# Altium PCB MotorControllerBackPlane.PcbDoc
Units mil, origin at the board's own origin, x right, y up, seen from the top; angles counter-clockwise.
Board outline 2770 x 6500 mil, 2 copper layers (Top Layer, Bottom Layer); 39 components, 42 nets, 235 pads, 37 vias.
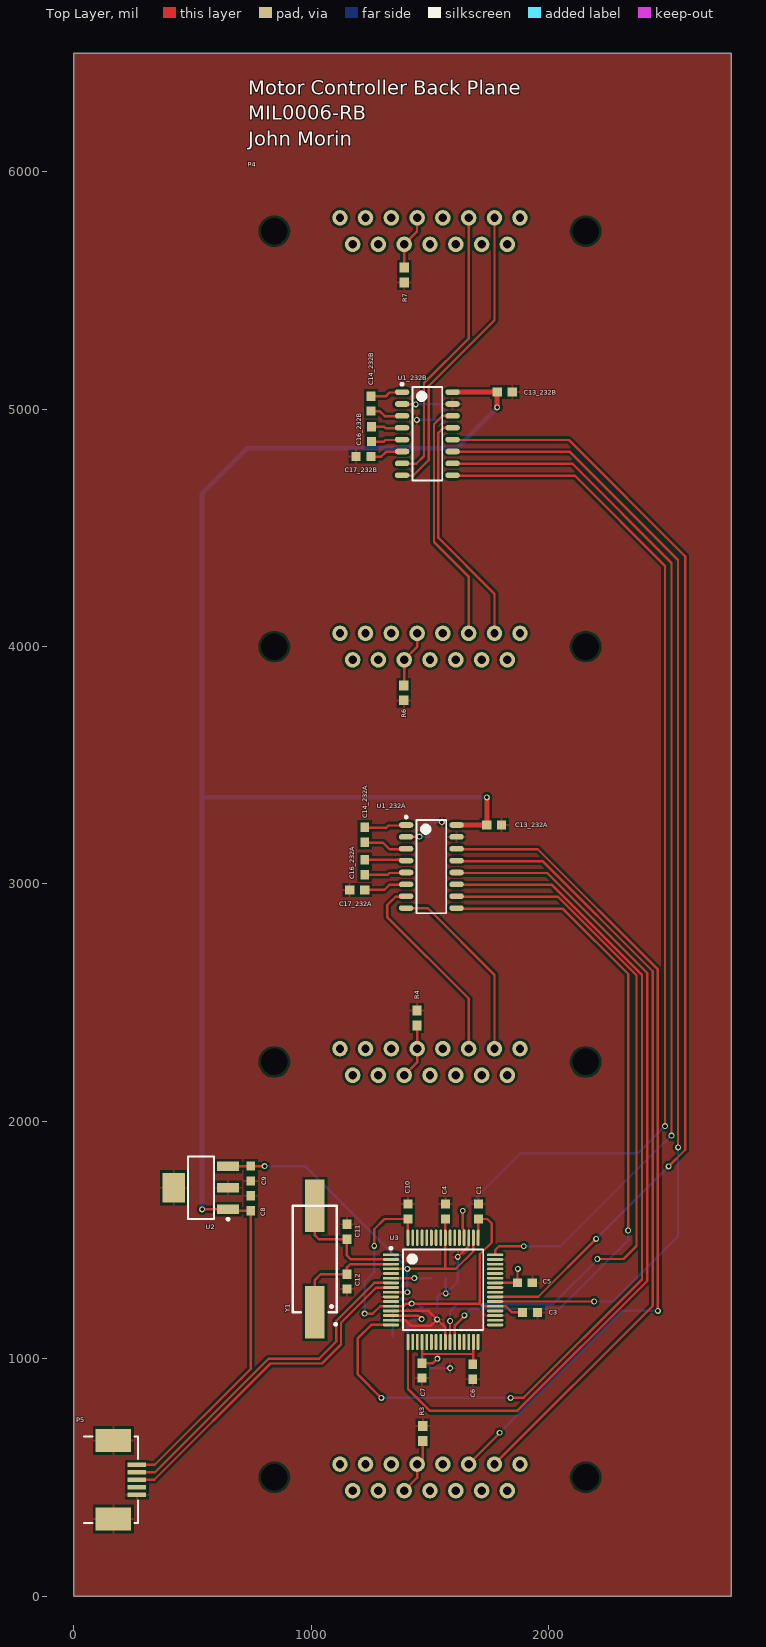
[diagram p0: Top Layer view]
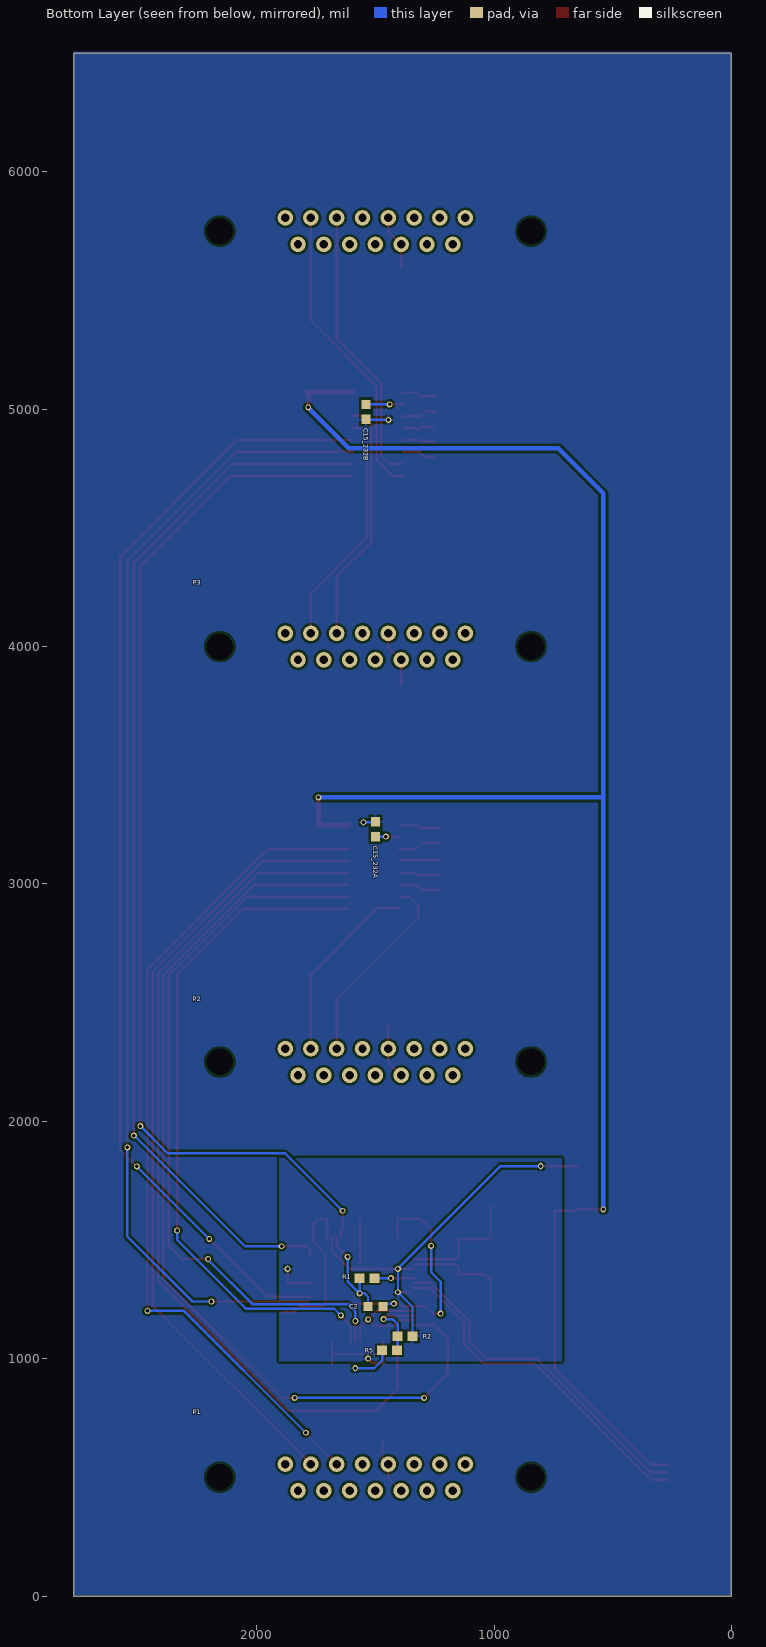
[diagram p1: Bottom Layer view, seen from below]

## Layer stack, top to bottom
Top Solder: solder mask 0.4, Solder Resist, Dk 3.5
Top Layer: signal copper 1.4
Dielectric 1: dielectric 12.6, FR-4, Dk 4.8
Bottom Layer: signal copper 1.4
Bottom Solder: solder mask 0.4, Solder Resist, Dk 3.5

## Board outline
0,0 0,6500 2770,6500 2770,0

## Design rules (kind name [scope] priority, off if disabled: settings)
Clearance [All] p1: gap=10 ignorepadtopadclearanceinfootprint=FALSE except(0: Arc-Hole Track-Hole SMDPad-Hole THPad-Hole Via-Hole Fill-Hole Poly-Hole Region-Hole Text-Hole; 4: Arc-Arc Arc-Track Arc-SMDPad Track-Track Track-SMDPad SMDPad-SMDPad)
PolygonConnect [All] p1: connectstyle=Relief reliefconductorwidth=10 reliefentries=4 polygonreliefangle="90 Angle" airgapwidth=10
RoutingVias [All] p1: holewidth=28 width=50 viastyle="Through Hole" minholewidth=28 minwidth=50 maxholewidth=28 maxwidth=50
SolderMaskExpansion [All] p1: expansion=4
Width [All] p1: maxlimit=20 minlimit=10 preferedwidth=10
30 further rules are at their usual default settings.

## Classes and differential pairs
channel class RS232: 232A 232B
component class MotorControllerBackPlane: C1 C2 C3 C4 C5 C6 C7 C8 C9 C10 C11 C12 P1 P2 P3 P4 P5 R1 R2 R3 R4 R5 R6 R7 U2 U3 Y1
component class 232B: C13_232B C14_232B C15_232B C16_232B C17_232B U1_232B
component class 232A: C13_232A C14_232A C15_232A C16_232A C17_232A U1_232A

## Components (designator, comment, footprint, x,y, rotation, side; value= is the part's Value field where it differs from the comment)
C1 "Cap" CAPC0603 1703.86,1620 r90 top value=100nF
C2 "Cap" CAPC0603 1499.68,1220 r0 bottom value=100nF
C3 "Cap" CAPC0603 1921.5,1195 r0 top value=100nF
C4 "Cap" CAPC0603 1564.84,1620 r90 top value=100nF
C5 "Cap" CAPC0603 1900,1320 r0 top value=100nF
C6 "Cap" CAPC0603 1680,945 r270 top value=100nF
C7 "Cap" CAPC0603 1466.42,950 r270 top value=100nF
C8 "Cap" CAPC0603 745,1655 r90 top value=100nF
C9 "Cap" CAPC0603 745,1780 r270 top value=100nF
C10 "Cap" CAPC0603 1407.36,1620 r90 top value=100nF
C11 "Cap" CAPC0603 1150,1535 r90 top value=36pF
C12 "Cap" CAPC0603 1150,1325 r270 top value=36pF
C13_232A "Cap" CAPC0603 1770,3248.19 r0 top value=1uF (schematic designator C13)
C13_232B "Cap" CAPC0603 1815,5071.69 r0 top value=1uF (schematic designator C13)
C14_232A "Cap" CAPC0603 1225,3206.81 r270 top value=1uF (schematic designator C14)
C14_232B "Cap" CAPC0603 1251.5,5023.5 r270 top value=1uF (schematic designator C14)
C15_232A "Cap" CAPC0603 1500,3230 r90 bottom value=1uF (schematic designator C15)
C15_232B "Cap" CAPC0603 1540,4988.5 r270 bottom value=1uF (schematic designator C15)
C16_232A "Cap" CAPC0603 1225,3070.43 r270 top value=1uF (schematic designator C16)
C16_232B "Cap" CAPC0603 1252.99,4895 r270 top value=1uF (schematic designator C16)
C17_232A "Cap" CAPC0603 1193.19,2975 r180 top value=1uF (schematic designator C17)
C17_232B "Cap" CAPC0603 1220,4800 r180 top value=1uF (schematic designator C17)
P1 "L717SDAH15POL2" L717SDAH15POL2#1 1500,500 r180 bottom
P2 "L717SDAH15POL2" L717SDAH15POL2#1 1500,2250 r180 bottom
P3 "L717SDAH15POL2" L717SDAH15POL2#1 1500,4000 r180 bottom
P4 "L717SDAH15POL2" L717SDAH15POL2#2 1500,5750 r180 top
P5 "UX60SC-MB-5ST" UX60SC-MB-5ST 265,490 r270 top
R1 "Res" RES0603 1535,1339.53 r0 bottom value=12k
R2 "Res" RES0603 1375,1095 r0 bottom value=1k
R3 "Res" RES0603 1470,685 r90 top value=0
R4 "Res" RES0603 1445,2435 r90 top value=0
R5 "Res" RES0603 1440,1035 r0 bottom value=100k
R6 "Res" RES0603 1390,3805 r270 top value=0
R7 "Res" RES0603 1391.34,5565 r270 top value=0
U1_232A "RS-232" RS-232 1505.79,3073.19 r0 top (schematic designator U1)
U1_232B "RS-232" RS-232 1488.7,4896.69 r0 top (schematic designator U1)
U2 "3.3V LDO Reg" SOT23-4n 535,1720 r180 top
U3 "FT4232H" FT4232HL 1555,1290 r0 top
Y1 "ABLS2-12.000MHZ-D4Y-T" HC49/US 1015,1420 r90 top

## Footprints (in the part's own frame and the unit in brackets; to place one, negate y for a bottom-side part, rotate by r counter-clockwise, add the part's x,y. Pads: shape width x height; smd on the part's side, far side on the other; paste and mask are expansions set on the pad)
CAPC0603 [mm] "Chip Capacitor, 2-Leads, Body 1.60x0.80mm, IPC Medium Density"
  rect 1x0.95 smd: 1(-0.8,0) 2(0.8,0)
  body extent -0.88,-0.48 0.87,0.48, height 0.8
FT4232HL [mm] "TSQFP, 64-Leads, Body 10.00x10.00mm, Pitch 0.50mm, IPC Medium Density"
  oval 1.75x0.3 smd: 1(-5.575,3.75) 2(-5.575,3.25) 3(-5.575,2.75) 4(-5.575,2.25) 5(-5.575,1.75) 6(-5.575,1.25) 7(-5.575,0.75) 8(-5.575,0.25) 9(-5.575,-0.25) 10(-5.575,-0.75) 11(-5.575,-1.25) 12(-5.575,-1.75) 13(-5.575,-2.25) 14(-5.575,-2.75) 15(-5.575,-3.25) 16(-5.575,-3.75) 33(5.575,-3.75) 34(5.575,-3.25) 35(5.575,-2.75) 36(5.575,-2.25) 37(5.575,-1.75) 38(5.575,-1.25) 39(5.575,-0.75) 40(5.575,-0.25) 41(5.575,0.25) 42(5.575,0.75) 43(5.575,1.25) 44(5.575,1.75) 45(5.575,2.25) 46(5.575,2.75) 47(5.575,3.25) 48(5.575,3.75)
  oval 0.3x1.75 smd: 17(-3.75,-5.575) 18(-3.25,-5.575) 19(-2.75,-5.575) 20(-2.25,-5.575) 21(-1.75,-5.575) 22(-1.25,-5.575) 23(-0.75,-5.575) 24(-0.25,-5.575) 25(0.25,-5.575) 26(0.75,-5.575) 27(1.25,-5.575) 28(1.75,-5.575) 29(2.25,-5.575) 30(2.75,-5.575) 31(3.25,-5.575) 32(3.75,-5.575) 49(3.75,5.575) 50(3.25,5.575) 51(2.75,5.575) 52(2.25,5.575) 53(1.75,5.575) 54(1.25,5.575) 55(0.75,5.575) 56(0.25,5.575) 57(-0.25,5.575) 58(-0.75,5.575) 59(-1.25,5.575) 60(-1.75,5.575) 61(-2.25,5.575) 62(-2.75,5.575) 63(-3.25,5.575) 64(-3.75,5.575)
  silkscreen extent -5.7,-4.3 4.3,4.57, body extent -5,-5 5,5, height 1.6
HC49/US [mm]
  rect 5.6x2.1 smd: 1(-5.7,0) 2(5.7,0)
  silkscreen extent -7.11,-2.35 5.7,2.35, body extent -6.35,-2.35 6.35,2.35, height 3.16
L717SDAH15POL2#1 [mm] "CONN D-SUB PLUG 15POS VERT SLDR"
  round 1.524 hole 2.84: 0(-16.65,0) 0(16.65,0)
  round 1.662 hole 0.9: 1(-9.63,1.42) 2(-6.9,1.42) 3(-4.14,1.42) 4(-1.38,1.42) 5(1.38,1.42) 6(4.14,1.42) 7(6.9,1.42) 8(9.63,1.42) 9(-8.28,-1.42) 10(-5.52,-1.42) 11(-2.76,-1.42) 12(0,-1.42) 13(2.76,-1.42) 14(5.52,-1.42) 15(8.28,-1.42)
  Top Layer pour cut-out: 3.886,-4.851
  body extent -19.6,-6.27 19.6,6.28, height 11.69
L717SDAH15POL2#2 [mm] "CONN D-SUB PLUG 15POS VERT SLDR"
  round 1.524 hole 2.84: 0(-16.65,0) 0(16.65,0)
  round 1.662 hole 0.9: 1(-9.63,-1.42) 2(-6.9,-1.42) 3(-4.14,-1.42) 4(-1.38,-1.42) 5(1.38,-1.42) 6(4.14,-1.42) 7(6.9,-1.42) 8(9.63,-1.42) 9(-8.28,1.42) 10(-5.52,1.42) 11(-2.76,1.42) 12(0,1.42) 13(2.76,1.42) 14(5.52,1.42) 15(8.28,1.42)
  Top Layer pour cut-out: 3.886,4.851
  body extent -19.6,-6.28 19.6,6.27, height 11.69
RES0603 [mm] "Chip Resistor, 2-Leads, Body 1.60x0.80mm, IPC Medium Density"
  rect 1.05x1 smd: 1(-0.8,0) 2(0.8,0)
  body extent -0.88,-0.48 0.87,0.47, height 0.8
RS-232 [mm] "IC DVR/RCVR RS232 DUAL 16SOIC"
  oval 1.55x0.6 smd: 1(-2.7,4.445) 2(-2.7,3.175) 3(-2.7,1.905) 4(-2.7,0.635) 5(-2.7,-0.635) 6(-2.7,-1.905) 7(-2.7,-3.175) 8(-2.7,-4.445) 9(2.7,-4.445) 10(2.7,-3.175) 11(2.7,-1.905) 12(2.7,-0.635) 13(2.7,0.635) 14(2.7,1.905) 15(2.7,3.175) 16(2.7,4.445)
  silkscreen extent -2.82,-5 1.6,5.42, body extent -2,-5 2,5, height 1.75
SOT23-4n [mm] "SOT223, 4-Leads, Body 6.50x7.00mm (avg), Pitch 2.30mm, IPC Medium Density"
  rect 2.4x1 smd: 1(-2.9,2.3) 2(-2.9,0) 3(-2.9,-2.3)
  rect 2.4x3.2 smd: 4(2.9,0)
  silkscreen extent -3.03,-3.35 1.4,3.47, body extent -1.85,-3.35 1.85,3.35, height 1.7
UX60SC-MB-5ST [mm] "USB Mini-B Recepticle"
  rect 0.5x2 smd: 1(-1.6,0) 2(-0.8,0) 3(0,0) 4(0.8,0) 5(1.6,0)
  rect 2.5x3.8 smd: SHD(-4.2,-2.5) SHD(4.2,-2.5)
  silkscreen extent -4.63,-5.63 4.62,0.13, body extent -4.9,-6.61 4.9,0.39, height 3.95

## Part data
C1 C2 C3 C4 C5 C6 C7 C8 C9 C10 C11 C12 C13_232A C13_232B C14_232A C14_232B C15_232A C15_232B C16_232A C16_232B C17_232A C17_232B: Supplier Part Number 1=1276-1000-1-ND, Supplier 1=Digi-Key
P1 P2 P3 P4: "CONN D-SUB PLUG 15POS VERT SLDR", Manufacturer 1="Amphenol Commercial Products", Supplier Part Number 1=L717SDAH15POL2-ND, ComponentLink1Description=Datasheet, ComponentLink1URL=https://cdn.amphenol-icc.com/media/wysiwyg/files/documentation/datasheet/cmio/d_df_machined_standard_density_dsub.pdf, Manufacturer Part Number 1=L717SDAH15POL2, Supplier 1=Digi-Key
P5: "USB Mini B Metal Shield SMT", Supplier Part Number 1=H11671CT-ND, Supplier 1=Digi-Key
R1 R2 R5: Supplier Part Number 1=RMCF0603JT10K0CT-ND, Supplier 1=Digi-Key
U1_232A U1_232B: "IC DVR/RCVR RS232 DUAL 16SOIC", Manufacturer 1="Texas Instruments", Supplier Part Number 1=296-25009-1-ND, ComponentLink1Description=Datasheet, ComponentLink1URL=*http://www.ti.com/lit/ds/symlink/trs232.pdf, ComponentLink2Description=Website, ComponentLink2URL=https://www.digikey.com/product-detail/en/texas-instruments/TRS232DR/296-25009-1-ND/2136546, Manufacturer Part Number 1=RS-232, Supplier 1=Digi-Key
U2: library part LM3940IMPX-3.3, "IC REG LDO 3.3V 1A SOT223", Supplier Part Number 1=LM3940IMPX-3.3/NOPBCT-ND, Supplier 1=Digi-Key
U3: "Quad High Speed USB to Multipurpose UART/MPSSE", Supplier Part Number 1=768-1026-1-ND, Supplier 1=Digi-Key
Y1: "12MHz ±30ppm Crystal 18pF 50 Ohm -40°C ~ 85°C Surface Mount HC49/US", Supplier Part Number 1=535-9869-1-ND, Supplier 1=Digi-Key
R3 R4 R6 R7: Supplier 1=Digi-Key

## Via types
v1: diameter 25, hole 15, Top Layer to Bottom Layer, 37 vias

## Nets (pads, with @x,y where several pads share a name; then routed paths per layer and width w, separated by ;. In a path a pad name is that pad's centre, name@x,y a point inside that pad or via, vN(x,y) a via of type N, cw(c..) or ccw(c..) an arc to the next point about the centre after c; other vN are vias at no path point)
1V8: C1.1 C2.1 C3.1 C10.1 U3.12 U3.37 U3.49 U3.64 | length 1865.7
  Top Layer w10: v1(1225,1189.93) 1259.12,1189.93 1290.29,1221.1 U3.12 1388.75,1221.1 1399.56,1231.92 v1(1422.5,1231.92) 1710,1231.92 ; v1(1265.14,1475) 1265.14,1545.14 1308.5,1588.5 C10.1@1406.14,1588.5 ; U3.64@1406.14,1509.49 C10.1@1406.14,1588.5 ; C10.1 C10.1@1406.14,1588.5 ; U3.49@1702.95,1509.49 1702.95,1587.6 C1.1 1741.5,1588.5 1760,1570 1760,1490 1710,1440 1710,1231.92 ; C3.1 1846.1,1195 1820,1221.1 U3.37 1720.81,1221.1 1710,1231.92
  Bottom Layer w10: v1(1225,1189.93) 1225,1323.78 1265.14,1363.92 v1(1265.14,1475) ; v1(1422.5,1231.92) 1445.68,1231.92 1462.89,1214.71 C2.1
3V3: C4.1 C5.1 C6.1 C7.1 C9.1 R2.1 U2.3 U3.4 U3.9 U3.20 U3.31 U3.42 U3.50 U3.56 | length 2568.9
  Top Layer w10: U2.3 650.12,1811.5 C9.1 v1(803.5,1811.5) ; U3.4 v1(1405,1378.58) 1565,1378.58 ; U3.9@1352.55,1280 v1(1405,1280) ; U3.20 1466.42,1020 ; v1(1530.83,1000) 1512.32,981.5 C7.1 1466.42,1020 ; C4.1 U3.56 1564.84,1378.74 1565,1378.58 ; C6.1 1682.95,979.45 1682.95,1020 ; U3.31 1682.95,1020 ; U3.50 1682.95,1452.95 1608.58,1378.58 1565,1378.58 ; U3.42 1774.96,1320 C5.1 1868.5,1377.09 v1(1870,1378.58) ; 1466.42,1020 1682.95,1020
  Bottom Layer w10: v1(803.5,1811.5) 973.5,1811.5 1405,1380 v1(1405,1378.58) v1(1405,1280) 1343.5,1218.5 R2.1
5V: C8.1 C13_232A.1 C13_232B.1 P5.1 U1_232A.16 U1_232B.16 U2.1 | length 7634.1
  Top Layer w10: P5.1 340.83,552.99 745,957.17 C8.1 655.12,1623.5 U2.1 v1(540,1629.45)
  Top Layer w20: U1_232B.16@1595.01,5072.24 1782.76,5072.24 C13_232B.1@1785,5070 ; U1_232A.16 C13_232A.1 1740,3249.69 v1(1740,3365) ; v1(1782.76,5007.3) 1782.76,5067.76 C13_232B.1@1785,5070 ; C13_232B.1@1788.48,5073.48 C13_232B.1@1785,5070
  Bottom Layer w20: v1(540,1629.45) 540,3365 ; v1(1740,3365) 540,3365 ; v1(1782.76,5007.3) 1782.76,5005.24 1612.52,4835 730,4835 540,4645 540,3365
GND: C1.2 C2.2 C3.2 C4.2 C5.2 C6.2 C7.2 C8.2 C9.2 C10.2 C11.2 C12.2 C13_232A.2 C13_232B.2 C15_232A.2 C15_232B.2 C17_232A.2 C17_232B.2 P5.5 P5.SHD R1.2 R3.2 R4.2 R5.2 R6.2 R7.2 U1_232A.15 U1_232B.15 U2.2 U2.4 U3.1 U3.5 U3.10 U3.11 U3.13 U3.15 U3.25 U3.35 U3.47 U3.51 | length 1272.6
  Top Layer w10: U3.15 1397.18,1162.05 1419.74,1139.49 1504.49,1139.49 v1(1530.42,1165.42) ; U3.13 1494.42,1201.42 v1(1530.42,1165.42) ; U3.25 1564.84,1131 v1(1530.42,1165.42) ; v1(1617.06,1428.78) 1663.27,1474.99 U3.51
  Bottom Layer w10: v1(1445,4954.71) 1537.7,4954.71 C15_232B.2 ; R5.2 1471.5,993.5 1505,960 v1(1584.8,960) ; C15_232A.2@1500,3256.5 1501.5,3255 1505,3255 1510,3260 v1(1550,3260) ; C2.2 1531.18,1261.18 1545,1275 v1(1566.5,1275) ; R1.2 v1(1566.5,1275) ; v1(1617.06,1428.78) 1617.06,1325.56 v1(1566.5,1275)
NetC11_1: C11.1 U3.2 Y1.2 | length 526.9
  Top Layer w10: Y1.2 1015,1520.28 1031.78,1503.5 C11.1 1150,1435 1166.42,1418.58 U3.2@1335.51,1418.58
NetC12_1: C12.1 U3.3 Y1.1 | length 500.8
  Top Layer w10: Y1.1 1015,1331.5 1040,1356.5 C12.1 1150,1384.8 1163.78,1398.58 U3.3@1335.51,1398.58
NetC14_232A_1: C14_232A.1 U1_232A.1 | length 178.5
  Top Layer w10: C14_232A.1@1225,3236.5 1315.53,3236.5 1325.13,3246.1 U1_232A.1@1399.49,3246.1
NetC14_232A_2: C14_232A.2 U1_232A.3 | length 185.8
  Top Layer w10: C14_232A.2@1225,3173.5 1302.19,3173.5 1329.59,3146.1 U1_232A.3@1399.49,3146.1
NetC14_232B_1: C14_232B.1 U1_232B.1 | length 137.1
  Top Layer w10: C14_232B.1 1315,5055 1330,5070 U1_232B.1@1382.4,5070
NetC14_232B_2: C14_232B.2 U1_232B.3 | length 140
  Top Layer w10: C14_232B.2 1287.99,4992.01 1310,4970 U1_232B.3@1382.4,4970
NetC15_232A_1: C15_232A.1 U1_232A.2 | length 100.5
  Top Layer w10: U1_232A.2@1398.4,3199.29 v1(1455.73,3199.29)
  Bottom Layer w10: v1@1456.82,3198.11 C15_232A.1@1500,3198.11
NetC15_232B_1: C15_232B.1 U1_232B.2 | length 157.6
  Top Layer w10: U1_232B.2@1382.4,5020 v1(1440,5020)
  Bottom Layer w10: v1(1440,5020) C15_232B.1
NetC16_232A_1: C16_232A.1 U1_232A.4 | length 174.5
  Top Layer w10: C16_232A.1@1225,3101.5 U1_232A.4@1399.49,3101.5
NetC16_232A_2: C16_232A.2 U1_232A.5 | length 177.6
  Top Layer w10: C16_232A.2@1225,3038.5 1322.25,3038.5 1329.84,3046.1 U1_232A.5@1399.49,3046.1
NetC16_232B_1: C16_232B.1 U1_232B.4 | length 132.1
  Top Layer w10: C16_232B.1 1306.65,4926.5 1313.14,4920 U1_232B.4@1382.4,4920
NetC16_232B_2: C16_232B.2 U1_232B.5 | length 132.1
  Top Layer w10: C16_232B.2 1305.81,4863.5 1312.31,4870 U1_232B.5@1382.4,4870
NetC17_232A_1: C17_232A.1 U1_232A.6 | length 183.5
  Top Layer w10: C17_232A.1 1307.25,2975 1328.35,2996.1 U1_232A.6@1399.49,2996.1
NetC17_232B_1: C17_232B.1 U1_232B.6 | length 139.2
  Top Layer w10: C17_232B.1 1295,4800 1315,4820 U1_232B.6@1382.4,4820
NetP1_5: P1.5 P1.13 R3.1 | length 242
  Top Layer w10: P1.13 1445.67,498.43 P1.5 1470,580.24 R3.1
NetP2_5: P2.5 P2.13 R4.1 | length 235.8
  Top Layer w10: P2.13 1445.67,2248.43 P2.5 1445.67,2394.17 R4.1@1455,2403.5
NetP3_5: P3.5 P3.13 R6.1 | length 242.5
  Top Layer w10: R6.1 1391.34,3837.83 P3.13 1445.67,3998.43 P3.5
NetP4_5: P4.5 P4.13 R7.1 | length 232
  Top Layer w10: R7.1 1391.02,5596.81 1391.02,5694.09 1445.35,5748.43 P4.5@1445.35,5805.91
NetP5_2: P5.2 U3.7 | length 1452.1
  Top Layer w10: P5.2 341.5,521.5 820,1000 1032.78,1000 1105,1072.22 1105,1159.39 1265.14,1319.53 U3.7
NetP5_3: P5.3 U3.8 | length 1468.8
  Top Layer w10: P5.3 338.28,490 828.28,980 1044.71,980 1125,1060.29 1125,1151.1 1273.43,1299.53 1343.8,1299.53 U3.8@1344.87,1300.61
NetR1_1: R1.1 U3.6 | length 168
  Top Layer w10: U3.6@1335.51,1339.53 v1(1434.53,1339.53)
  Bottom Layer w10: v1(1434.53,1339.53) R1.1
NetR2_2: R2.2 R5.1 U3.14 | length 322.3
  Top Layer w10: U3.14 1450.26,1181.73 v1(1465,1166.99) v1@1465,1175
  Bottom Layer w10: R5.1@1405.67,1035 1405.67,1145.38 1427.28,1166.99 v1(1465,1166.99)
R1IN: P1.2 U1_232A.13 | length 3370.3
  Top Layer w10: U1_232A.13@1612.09,3096.1 1973.9,3096.1 2438.1,2631.9 2438.1,1222.35 P1.2
R2IN: P2.2 U1_232A.8 | length 799.7
  Top Layer w10: U1_232A.8 1490.47,2898.19 1771.65,2617.01 P2.2
R3IN: P3.2 U1_232B.13 | length 1011.9
  Top Layer w10: U1_232B.13@1595,4921.32 1556.32,4921.32 1535,4900 1535,4458.74 1771.81,4221.93 P3.2@1771.81,4055
R4IN: P4.2 U1_232B.8 | length 1274.8
  Top Layer w10: U1_232B.8@1382.4,4720 1429.71,4720 1495,4785.29 1495,5097.96 1771.65,5374.61 P4.2
T1OUT: P1.3 U1_232A.14 | length 3559.7
  Top Layer w10: U1_232A.14@1612.09,3146.1 1953.9,3146.1 2460,2640 v1(2460,1201.42) ; P1.3 v1@1793.2,686.11
  Bottom Layer w10: v1(1793.2,688.2) 2306.42,1201.42 v1(2460,1201.42)
T2OUT: P2.3 U1_232A.7 | length 841.5
  Top Layer w10: U1_232A.7@1399.49,2946.1 1355.29,2946.1 1319.51,2910.32 1319.51,2860.49 1662.99,2517.01 P2.3
T3OUT: P3.3 U1_232B.14 | length 1033.7
  Top Layer w10: U1_232B.14 1551.99,4971.69 1517.02,4936.72 1517.02,4440.36 1662.67,4294.71 1662.67,4056.22 P3.3
T4OUT: P4.3 U1_232B.7 | length 1187.3
  Top Layer w10: U1_232B.7@1382.4,4770 1442.5,4770 1475,4802.5 1475,5110 1662.99,5297.99 P4.3
TTL_RxD1: U1_232A.12 U3.17 | length 3745.3
  Top Layer w10: U3.17 1407.36,872.64 1500,780 1867.09,780 2415,1327.91 2415,2625 1993.9,3046.1 U1_232A.12@1612.09,3046.1
TTL_RxD2: U1_232A.9 U3.27 | length 2915.3
  Top Layer w10: U3.27@1605,1062.7 1605,1140.37 1645,1180.37 v1(1645,1182.69) ; U1_232A.9@1612.09,2896.1 2058.9,2896.1 2335,2620 v1(2335,1540)
  Bottom Layer w10: v1(1645,1182.69) 1673.04,1210.72 2045.72,1210.72 2335,1500 v1(2335,1540)
TTL_RxD3: U1_232B.12 U3.39 | length 4740.1
  Top Layer w10: U1_232B.12@1595,4870 2085,4870 2575,4380 2575,2335 2575,1880 v1(2505,1810) ; U3.39 1775.12,1261.1 1956.1,1261.1 v1(2199.74,1504.74)
  Bottom Layer w10: v1(2199.74,1504.74) v1(2505,1810)
TTL_RxD4: U1_232B.9 U3.52 | length 4529.3
  Top Layer w10: U1_232B.9@1595,4720 2110,4720 2490.03,4339.97 2490.03,2145 v1(2490.03,1980) ; v1(1638.07,1623.19) 1638.07,1546.93 1645,1540 1645,1510.91 U3.52
  Bottom Layer w10: v1(1638.07,1623.19) 1879.88,1865 2375,1865 v1(2490.03,1980)
TTL_TxD1: U1_232A.11 U3.16 | length 3981.3
  Top Layer w10: v1(1295,835) 1195,935 1195,1085 1252.36,1142.36 U3.16 ; U1_232A.11@1612.09,2996.1 2013.9,2996.1 2393.1,2616.9 2393.1,1484.57 2393.1,1334.29 1894.4,835.6 1840.6,835.6 v1(1840,835)
  Bottom Layer w10: v1(1295,835) v1(1840,835)
TTL_TxD2: U1_232A.10 U3.26 | length 3066
  Top Layer w10: U3.26 1585,1070.98 1584.53,1071.46 v1(1584.53,1158.79) ; U1_232A.10@1612.09,2946.1 2038.9,2946.1 2370,2615 2370,1475 2315,1420 v1(2205,1420)
  Bottom Layer w10: v1(1584.53,1158.79) 1584.53,1199.53 1615,1230 2018.28,1230 2205,1416.72 v1(2205,1420)
TTL_TxD3: U1_232B.11 U3.38 | length 4863.5
  Top Layer w10: U1_232B.11@1595,4820 2090,4820 2545,4365 2545,1965 2545,1950.82 ; U3.38@1783.4,1241.1 v1(2191.1,1241.1) ; v1(2545,1890) 2545,1927.99 ; 2545.03,1928.01 2545.03,1950.79
  Bottom Layer w10: v1(2191.1,1241.1) 2271.1,1241.1 2545,1515 v1(2545,1890)
TTL_TxD4: U1_232B.10 U3.48 | length 4475
  Top Layer w10: U1_232B.10@1595,4770 2100,4770 2517.53,4352.47 v1(2517.53,1939.4) ; U3.48 1774.49,1457.02 1791.29,1473.82 v1(1895,1473.82)
  Bottom Layer w10: v1@1890.76,1473.82 v1(1895,1473.82) 2048.82,1473.82 2514.4,1939.4 v1(2517.53,1939.4)
pads on no net: P1.0 P1.1 P1.4 P1.6 P1.7 P1.8 P1.9 P1.10 P1.11 P1.12 P1.14 P1.15 P2.0 P2.1 P2.4 P2.6 P2.7 P2.8 P2.9 P2.10 P2.11 P2.12 P2.14 P2.15 P3.0 P3.1 P3.4 P3.6 P3.7 P3.8 P3.9 P3.10 P3.11 P3.12 P3.14 P3.15 P4.0 P4.1 P4.4 P4.6 P4.7 P4.8 P4.9 P4.10 P4.11 P4.12 P4.14 P4.15 P5.4 U3.18 U3.19 U3.21 U3.22 U3.23 U3.24 U3.28 U3.29 U3.30 U3.32 U3.33 U3.34 U3.36 U3.40 U3.41 U3.43 U3.44 U3.45 U3.46 U3.53 U3.54 U3.55 U3.57 U3.58 U3.59 U3.60 U3.61 U3.62 U3.63

## Polygon pours and split planes (outlines as drawn)
GND on Top Layer "Top Layer-No Net 1" (solid, pour order 0): 0,6500 2770,6500 2770,0 0,0
no net on Top Layer "Top Layer-No Net" (solid, pour order 2): 580,6490
GND on Bottom Layer "GND_L02_P008" (solid, pour order 8): 0,6505 2770,6505 2770,5 0,5
3V3 on Bottom Layer "Bottom Layer-3V3" (solid, pour order 6): 715,1845 715,990 1905,990 1905,1845

## Silkscreen, mask and mechanical layers (free items; w line width, h text height)
Top Overlay:
  text "Motor Controller Back Plane" at 735,6325 h60
  text "MIL0006-RB" at 735,6220 h60
  text "John Morin" at 735,6110 h60
BO:
  the board outline again, w10